# EAGLE board final_board (EAGLE 9.6.2)
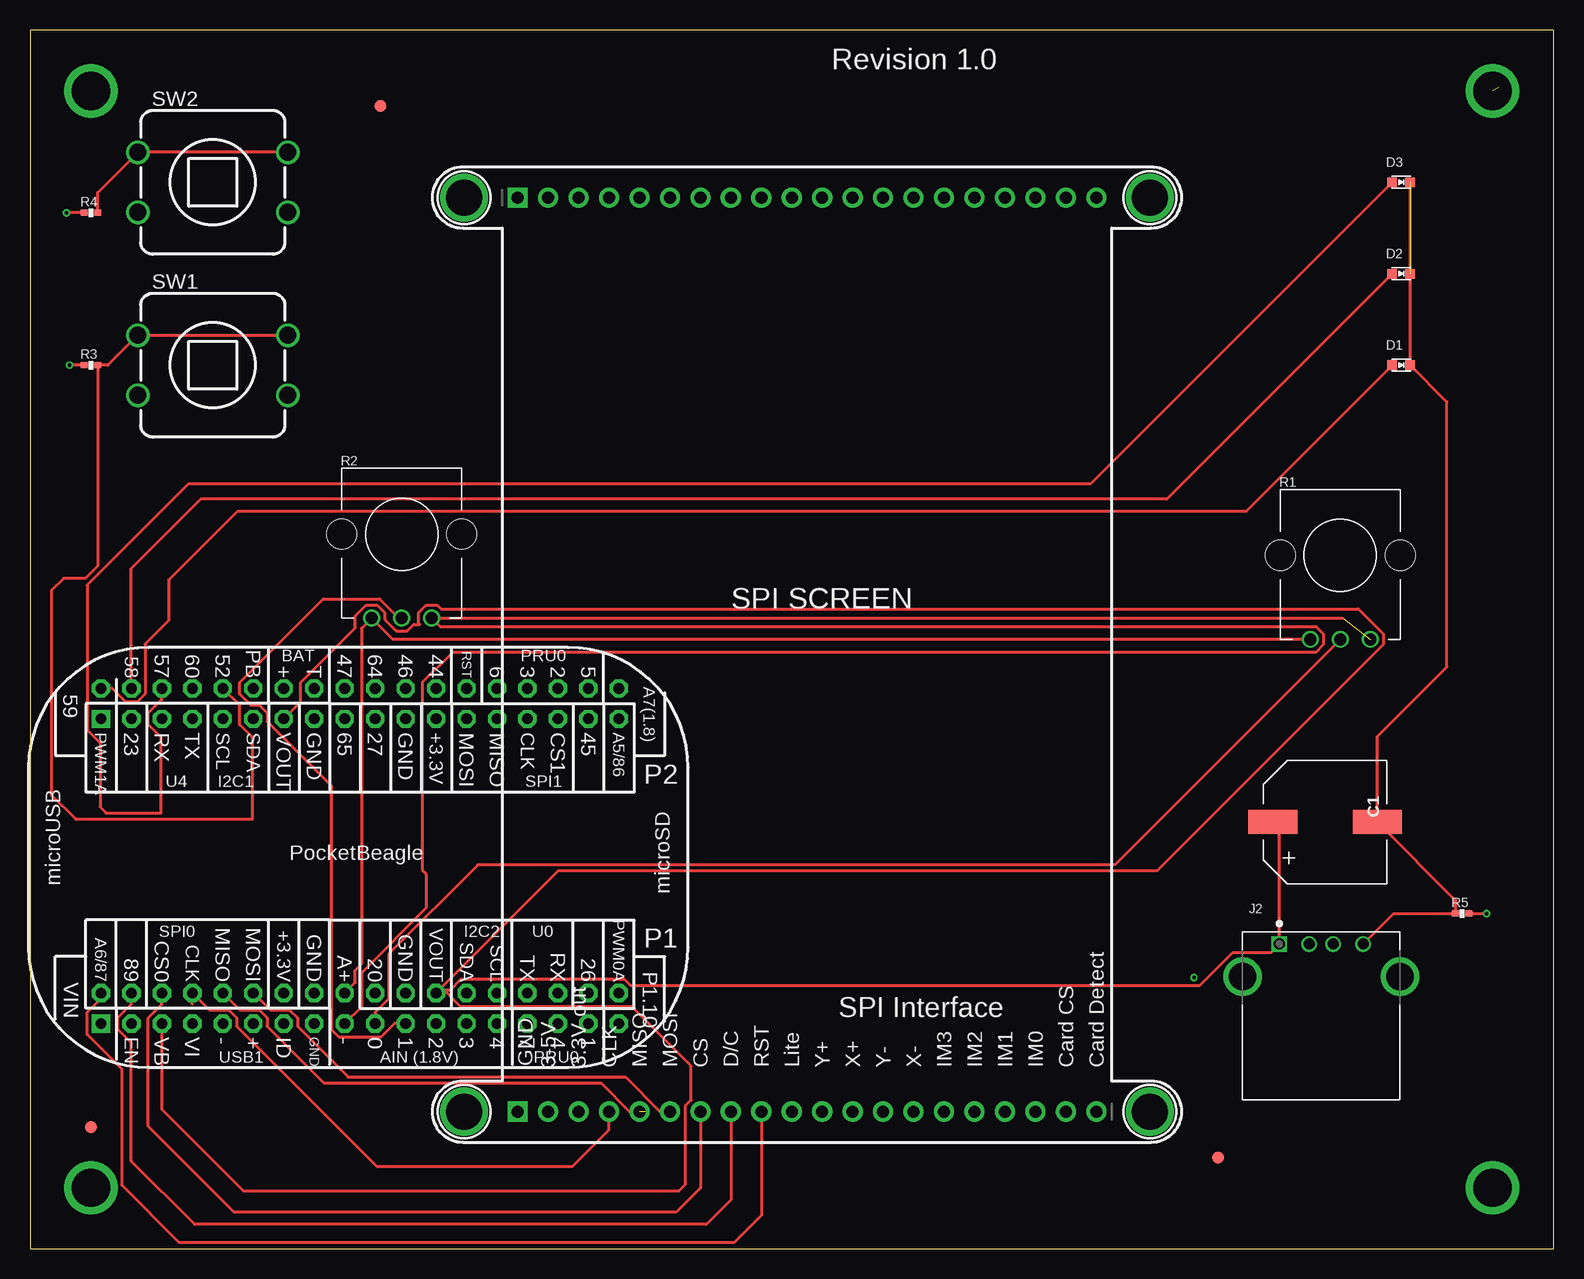
[diagram p0: board, top side]
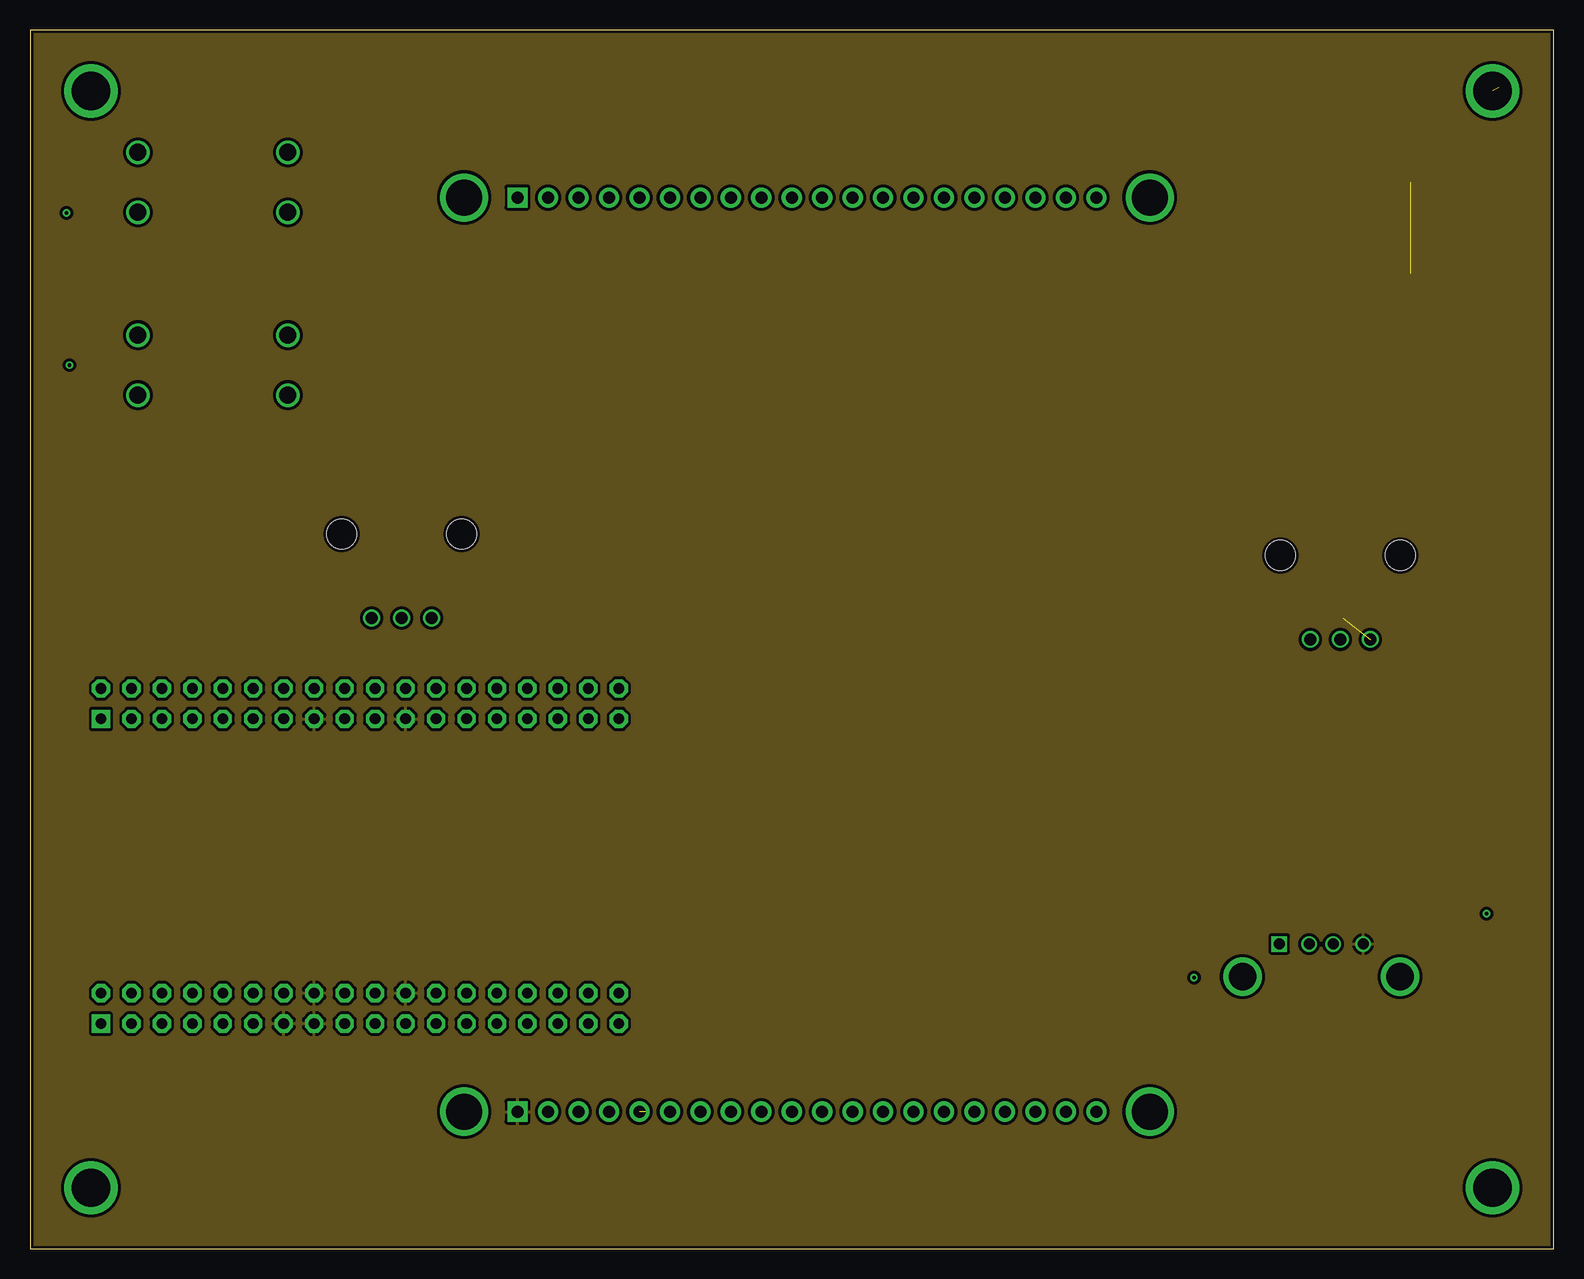
[diagram p1: board, inner layer Route2]
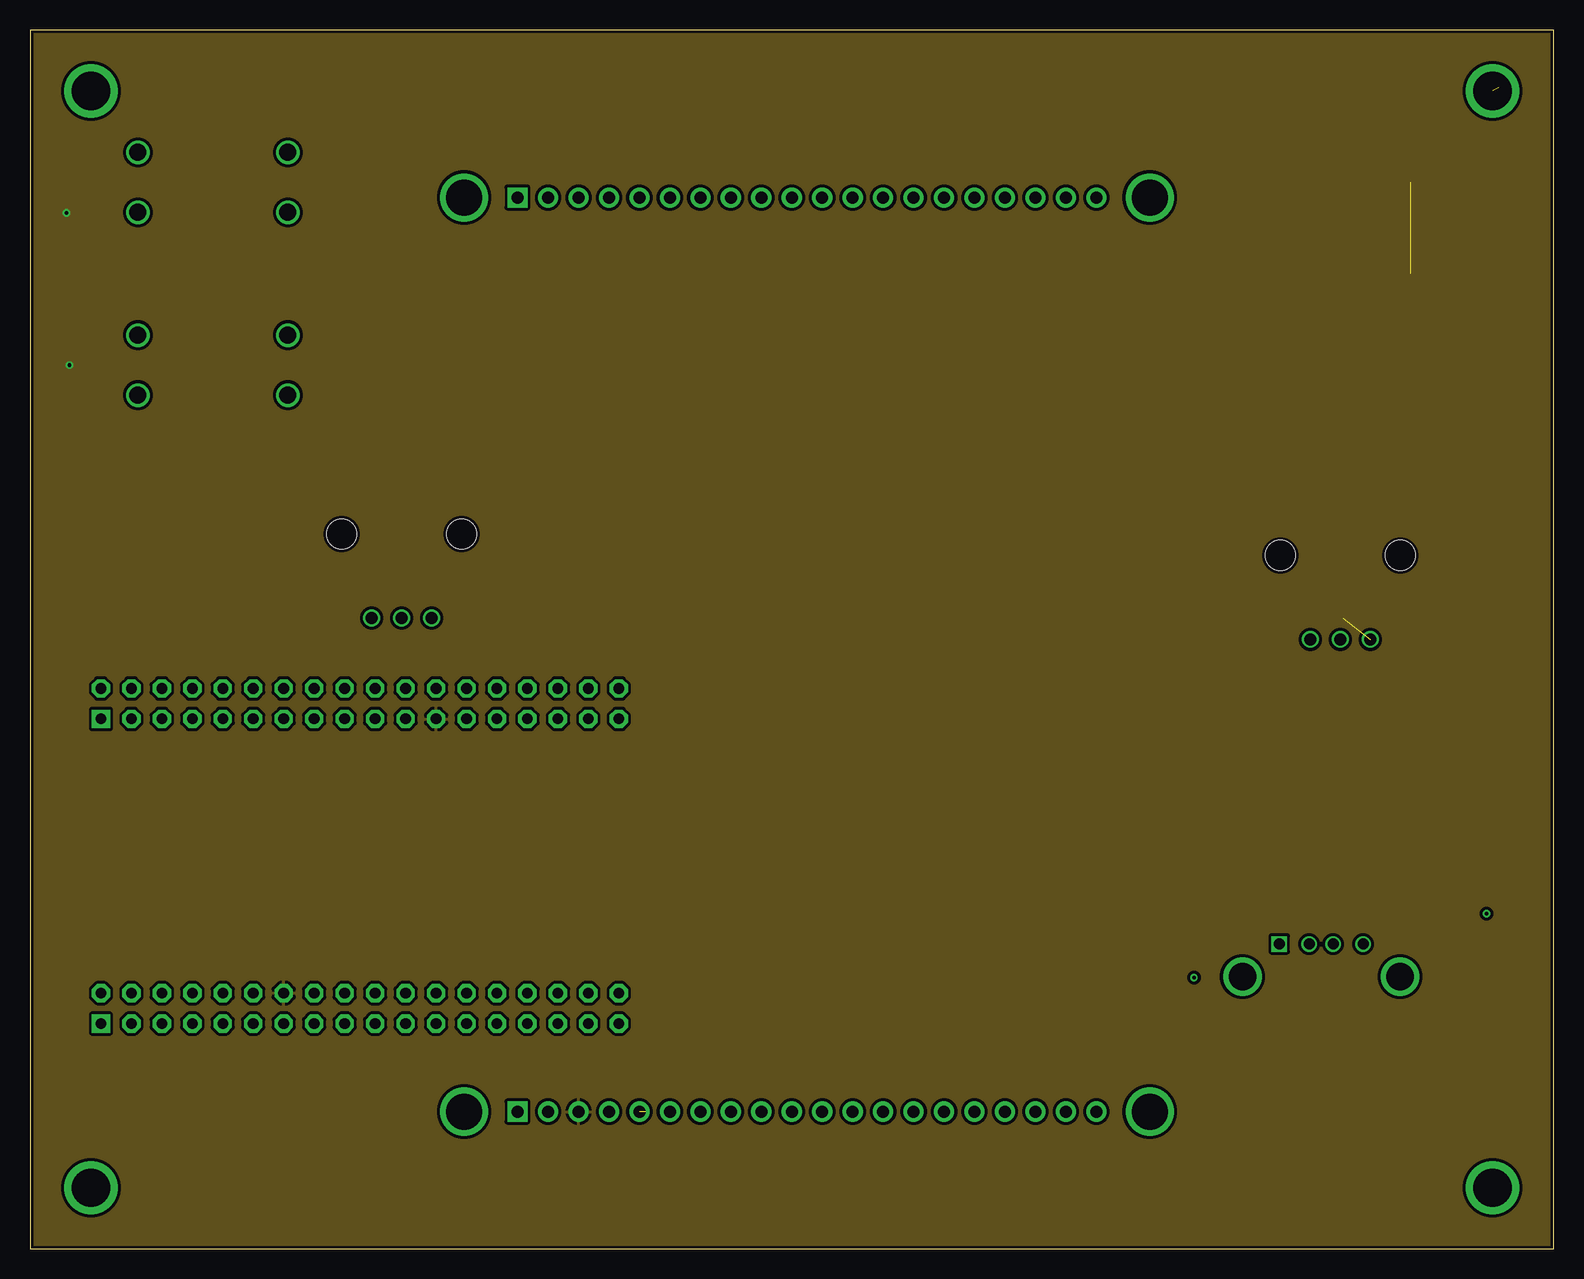
[diagram p2: board, inner layer Route15]
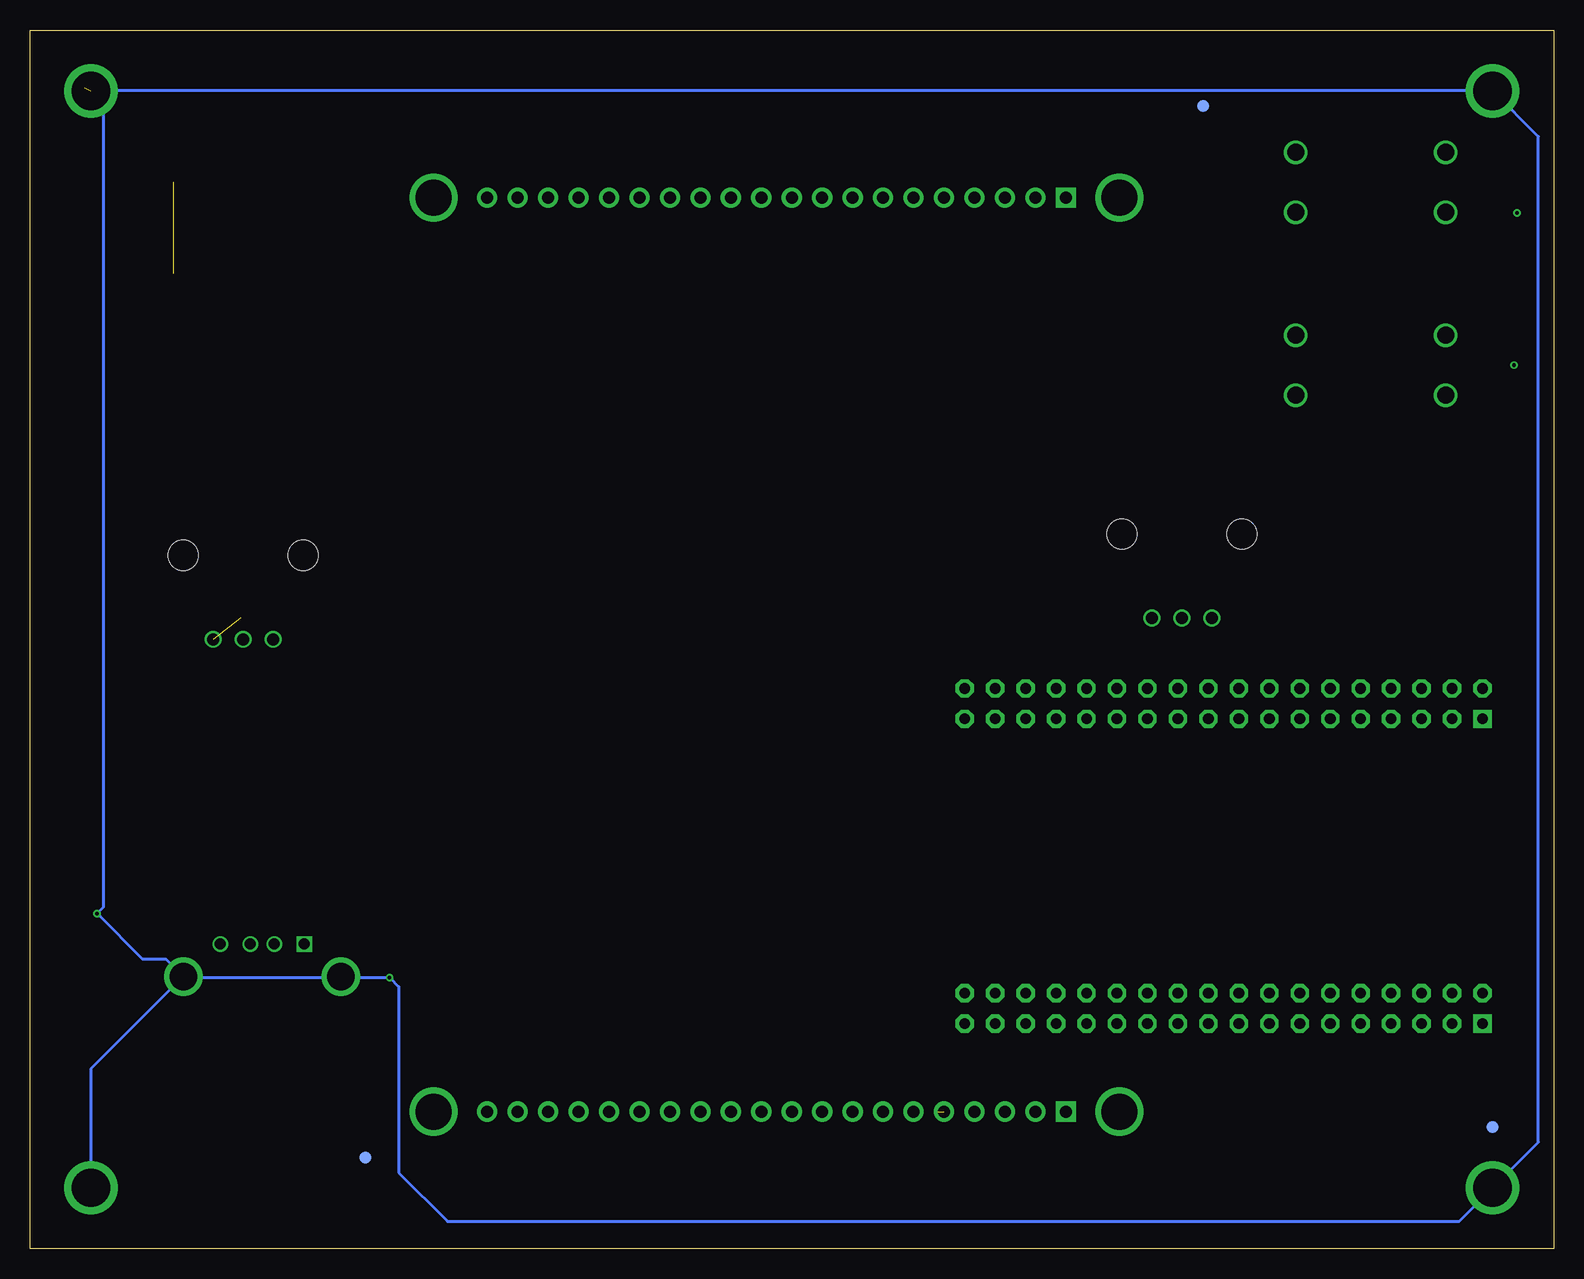
[diagram p3: board, bottom side, seen from below]

Size 127 x 101.6 mm. Coordinates in mm from the lower left corner, seen from the top.
Outline: 0,0 127,0 127,101.6 0,101.6 0,0
Copper layers (1*2*15*16): Top 0.035mm / dielectric 0.23mm / Route2 0.035mm / dielectric 0.93mm / Route15 0.035mm / dielectric 0.23mm / Bottom 0.035mm
Design rules "ENGI301_4lyr (1)": minimum track width 10mil, minimum drill 12mil, track to track 10mil, track to pad 10mil, pad to pad 10mil, via to via 10mil, smd to smd 10mil, copper to edge 10mil, drill to drill 12mil, minimum pad ring 6mil, minimum via ring 6mil, stop-mask expansion 3mil, vias tented up to drill 25mil, thermal gap 10mil

## Footprints (pad centres in the part's own frame; a part is rotated, then mirrored left to right if it is on the bottom)
CP10MM = smd 2 x 4.1: P$1 0,-4.35; P$2 0,4.35
EIA-STD = smd 0.8 x 0.8: ANODE -0.75,0; CATHODE 0.75,0
FIDUCIAL_40MIL = smd 1.016 x 1.016: P$1 0,0
TFT_LCD_PCB = drill 1 pad 1.676 square: 1@JP1 -24.13,38.1; 1@JP2 -24.13,-38.1 | drill 1 pad 1.676: 2@JP1 -21.59,38.1; 2@JP2 -21.59,-38.1; 3@JP1 -19.05,38.1; 3@JP2 -19.05,-38.1; 4@JP1 -16.51,38.1; 4@JP2 -16.51,-38.1; 5@JP1 -13.97,38.1; 5@JP2 -13.97,-38.1; 6@JP1 -11.43,38.1; 6@JP2 -11.43,-38.1; 7@JP1 -8.89,38.1; 7@JP2 -8.89,-38.1; 8@JP1 -6.35,38.1; 8@JP2 -6.35,-38.1; 9@JP1 -3.81,38.1; 9@JP2 -3.81,-38.1; 10@JP1 -1.27,38.1; 10@JP2 -1.27,-38.1; 11@JP1 1.27,38.1; 11@JP2 1.27,-38.1; 12@JP1 3.81,38.1; 12@JP2 3.81,-38.1; 13@JP1 6.35,38.1; 13@JP2 6.35,-38.1; 14@JP1 8.89,38.1; 14@JP2 8.89,-38.1; 15@JP1 11.43,38.1; 15@JP2 11.43,-38.1; 16@JP1 13.97,38.1; 16@JP2 13.97,-38.1; 17@JP1 16.51,38.1; 17@JP2 16.51,-38.1; 18@JP1 19.05,38.1; 18@JP2 19.05,-38.1; 19@JP1 21.59,38.1; 19@JP2 21.59,-38.1; 20@JP1 24.13,38.1; 20@JP2 24.13,-38.1 | drill 3 pad 3.6: P$1@U$7 -28.575,-38.1; P$1@U$15 28.575,-38.1; P$1@U$16 -28.575,38.1; P$1@U$17 28.575,38.1
TE_292303-1 = drill 0.92 square: 1 0,0 | drill 0.92: 2 2.5,0; 3 4.5,0; 4 7,0 | drill 2.3: SH1 -3.07,-2.71; SH2 10.07,-2.71
MOUNTING_HOLE = drill 3.175 pad 4.445: P$1 0,0
POT-PO90S = drill 1: CCW -2.5,0; CW 2.5,0; S 0,0 | hole 2.5: -5,7; 5,7
R0402 = smd 0.61 x 0.508: 1 -0.559,0; 2 0.559,0
BUTTON_12.5MM = drill 1.4: 1 -6.25,2.5; 2 -6.25,-2.5; 3 6.25,2.5; 4 6.25,-2.5
POCKETBEAGLE = drill 0.889 pad 1.524 square: P1_01 5.91,3.53; P2_01 5.91,28.93 | drill 0.889 pad 1.524 octagon: P1_02 5.91,6.07; P1_03 8.45,3.53; P1_04 8.45,6.07; P1_05 10.99,3.53; P1_06 10.99,6.07; P1_07 13.53,3.53; P1_08 13.53,6.07; P1_09 16.07,3.53; P1_10 16.07,6.07; P1_11 18.61,3.53; P1_12 18.61,6.07; P1_13 21.15,3.53; P1_14 21.15,6.07; P1_15 23.69,3.53; P1_16 23.69,6.07; P1_17 26.23,3.53; P1_18 26.23,6.07; P1_19 28.77,3.53; P1_20 28.77,6.07; P1_21 31.31,3.53; P1_22 31.31,6.07; P1_23 33.85,3.53; P1_24 33.85,6.07; P1_25 36.39,3.53; P1_26 36.39,6.07; P1_27 38.93,3.53; P1_28 38.93,6.07; P1_29 41.47,3.53; P1_30 41.47,6.07; P1_31 44.01,3.53; P1_32 44.01,6.07; P1_33 46.55,3.53; P1_34 46.55,6.07; P1_35 49.09,3.53; P1_36 49.09,6.07; P2_02 5.91,31.47; P2_03 8.45,28.93; P2_04 8.45,31.47; P2_05 10.99,28.93; P2_06 10.99,31.47; P2_07 13.53,28.93; P2_08 13.53,31.47; P2_09 16.07,28.93; P2_10 16.07,31.47; P2_11 18.61,28.93; P2_12 18.61,31.47; P2_13 21.15,28.93; P2_14 21.15,31.47; P2_15 23.69,28.93; P2_16 23.69,31.47; P2_17 26.23,28.93; P2_18 26.23,31.47; P2_19 28.77,28.93; P2_20 28.77,31.47; P2_21 31.31,28.93; P2_22 31.31,31.47; P2_23 33.85,28.93; P2_24 33.85,31.47; P2_25 36.39,28.93; P2_26 36.39,31.47; P2_27 38.93,28.93; P2_28 38.93,31.47; P2_29 41.47,28.93; P2_30 41.47,31.47; P2_31 44.01,28.93; P2_32 44.01,31.47; P2_33 46.55,28.93; P2_34 46.55,31.47; P2_35 49.09,28.93; P2_36 49.09,31.47

## Placement (x,y rotation side)
C1  [CP10MM]  107.95,35.56 270 top
D1  LED  [EIA-STD]  114.3,73.66 0 top
D2  LED  [EIA-STD]  114.3,81.28 0 top
D3  LED  [EIA-STD]  114.3,88.9 0 top
FUD1  FIDUCIAL  [FIDUCIAL_40MIL]  99.06,7.62 0 bottom
FUD2  FIDUCIAL  [FIDUCIAL_40MIL]  29.21,95.25 0 top
FUD4  FIDUCIAL  [FIDUCIAL_40MIL]  5.08,10.16 0 top
FUD5  FIDUCIAL  [FIDUCIAL_40MIL]  99.06,7.62 0 top
FUD6  FIDUCIAL  [FIDUCIAL_40MIL]  29.21,95.25 0 bottom
FUD7  FIDUCIAL  [FIDUCIAL_40MIL]  5.08,10.16 0 bottom
J1  LCD  [TFT_LCD_PCB]  64.77,49.53 0 top
J2  292303-1  [TE_292303-1]  104.14,25.4 0 top
MGT1  MOUNTING_HOLE  [MOUNTING_HOLE]  5.08,96.52 0 top
MGT2  MOUNTING_HOLE  [MOUNTING_HOLE]  121.92,96.52 0 top
MGT3  MOUNTING_HOLE  [MOUNTING_HOLE]  121.92,5.08 0 top
MGT4  MOUNTING_HOLE  [MOUNTING_HOLE]  5.08,5.08 0 top
R1  POTENTIOMETER  [POT-PO90S]  109.22,50.8 0 top
R2  POTENTIOMETER  [POT-PO90S]  30.99,52.58 0 top
R3  [R0402]  5.08,73.66 0 top
R4  [R0402]  5.08,86.36 0 top
R5  [R0402]  119.38,27.94 0 top
SW1  PUSH_BUTTON  [BUTTON_12.5MM]  15.24,73.66 0 top
SW2  PUSH_BUTTON  [BUTTON_12.5MM]  15.24,88.9 0 top
U1  POCKETBEAGLE  [POCKETBEAGLE]  0,15.24 0 top

## Library data of the parts
C1 = combo_lock; POPULATE: 1
D1-D3 FUD1 FUD2 FUD4-FUD7 MGT1-MGT4 R1-R5 SW1 SW2 U1 = combo_lock
J1 = lcd
J2 = combo_lock; AVAILABILITY: In Stock; CENTERLINE_PITCH: 2 mm[.078 in]; COMMENT: 292303-1; DESCRIPTION: Conn; Data; USB; Recept; 2.0; 4 Pos; 1 Port; Rt Angle; A Ser; Tin over Copper; EU_ROHS_COMPLIANCE: Compliant; MF: TE Connectivity; MP: 292303-1; NUMBER_OF_POSITIONS: 4; PACKAGE: None; PRICE: None; PRODUCT_TYPE: Connector; PURCHASE-URL: https://pricing.snapeda.com/search/part/292303-1/?ref=eda

## Nets
AGND: R1.CW R2.CW U1.P1_17
BAT.VIN: U1.P2_14
BUTTON-2: U1.P2_08
BUTTON_1: R3.2 SW1.1 SW1.3 U1.P2_10
BUTTON_2: R4.2 SW2.1 SW2.3
CGND: J2.SH1 J2.SH2 MGT1.P$1 MGT2.P$1 MGT3.P$1 MGT4.P$1 R5.2
GND: C1.P$2 D1.CATHODE D2.CATHODE D3.CATHODE J1.1@JP2 J2.4 R5.1 U1.P1_13 U1.P1_15 U1.P1_16 U1.P1_22 U1.P2_15 U1.P2_21
LCD_CLK: J1.4@JP2 U1.P1_08
LCD_CS: J1.7@JP2 U1.P1_06
LCD_DC: J1.8@JP2 U1.P1_04
LCD_MISO: J1.5@JP2 U1.P1_10
LCD_MOSI: J1.6@JP2 U1.P1_12
LCD_RST: J1.9@JP2 U1.P1_02
LED_BLUE: D3.ANODE U1.P2_06
LED_GREEN: D2.ANODE U1.P2_04
LED_RED: D1.ANODE U1.P2_02
LEFT_POT: R1.S U1.P1_19
N$1: J2.2
N$2: U1.P1_09
N$3: U1.P1_11
N$4: J2.3
RIGHT_POT: R2.S U1.P1_21
VDD_1P8V: R1.CCW R2.CCW U1.P1_18
VDD_3P3V: J1.3@JP2 R3.1 R4.1 U1.P1_14 U1.P2_23
VDD_5V: C1.P$1 J2.1 U1.P1_05 U1.P1_24 U1.P2_13
VIN: U1.P1_01

## Tracks (layer width: path | path; a pad name or v marks a point on that pad's centre or on a via)
AGND  (1 unrouted)
  Top 0.254: U1.P1_17 27.63,20.17 27.63,23.01 33.02,28.4 33.02,31.24 32.71,31.55 32.71,47.18 35.24,49.72 107.17,49.72 107.8,50.35 107.8,51.25 107.17,51.88 34.19,51.88 R2.CW 109.43,52.58
BUTTON_1
  Top 0.254: SW1.3 SW1.1 6.49,73.66 R3.2 5.64,56.9 4.62,55.88 2.79,55.88 1.78,54.86 1.78,37.85 3.81,35.81 18.54,35.81 18.54,42.62 17.47,43.7 17.47,45.31 U1.P2_10 16.07,46.55
BUTTON_2
  Top 0.254: R4.2 5.64,88.05 8.96,91.37 SW2.1 SW2.3
CGND  (via drill 0.3 pad 0.61)  (1 unrouted)
  Top 0.254: R5.2 v121.41,27.94
  Bottom 0.254: J2.SH1 100.99,22.61 | 100.99,22.61 v97.03,22.61 96.27,21.84 96.27,6.35 92.2,2.29 7.87,2.29 MGT4.P$1 1.27,8.89 1.27,92.71 MGT1.P$1 122.17,96.52 122.43,96.77 | MGT3.P$1 121.92,14.98 J2.SH2 115.65,24.13 117.6,24.13 v121.41,27.94 120.9,28.45 120.9,95.5 MGT2.P$1 | 114.81,22.61 100.99,22.61
GND  (1 unrouted)
  Top 0.254: D3.CATHODE 115.06,88.89 115.06,80.52 115.05,80.51 D1.CATHODE 118.11,70.6 118.11,48.51 112.3,42.7 C1.P$2 118.82,29.04 R5.1 113.68,27.94 J2.4
  pour Route2: -5.08,-5.08 -5.08,106.68 132.08,106.68 132.08,-5.08
LCD_CLK
  Top 0.254: 13.53,20.39 U1.P1_08 14.93,19.91 16.54,19.91 17.21,19.24 17.21,18.55 28.91,6.86 45.21,6.86 48.26,9.91 J1.4@JP2
LCD_CS
  Top 0.254: U1.P1_06 10.99,20.39 9.85,19.24 9.85,10.22 17.02,3.05 53.85,3.05 55.88,5.08 J1.7@JP2
LCD_DC
  Top 0.254: J1.8@JP2 58.42,4.06 56.39,2.03 13.72,2.03 8.45,7.3 8.45,17.15 7.31,18.3 7.31,19.24 8.45,20.39 U1.P1_04
LCD_MISO  (1 unrouted)
  Top 0.254: U1.P1_10 17.47,19.91 19.08,19.91 19.75,19.24 19.75,18.55 24.48,13.82 47.59,13.82 49.98,11.43 51.31,11.43
LCD_MOSI
  Top 0.254: U1.P1_12 20.01,19.91 21.62,19.91 22.29,19.24 22.29,18.55 26.52,14.33 49.63,14.33 52.52,11.43 J1.6@JP2
LCD_RST
  Top 0.254: J1.9@JP2 60.96,2.79 58.67,0.51 12.45,0.51 7.68,5.27 7.68,14.93 4.77,17.85 4.77,19.69 5.91,20.83 U1.P1_02
LED_BLUE
  Top 0.254: D3.ANODE 88.4,63.75 13.21,63.75 4.77,55.31 4.77,43.25 5.84,42.17 5.84,36.83 6.35,36.32 10.92,36.32 10.92,42.62 9.85,43.7 9.85,44.64 10.99,45.79 U1.P2_06 11.18,46.9
LED_GREEN
  Top 0.254: D2.ANODE 94.75,62.48 14.22,62.48 8.38,56.64 8.38,46.78 U1.P2_04
LED_RED
  Top 0.254: D1.ANODE 101.36,61.47 17.27,61.47 11.56,55.75 11.56,52.36 9.59,50.39 9.59,46.24 8.92,45.57 7.98,45.57 6.83,46.71 U1.P2_02
LEFT_POT
  Top 0.254: R1.S 90.42,32 37.34,32 29.91,24.58 29.91,20.84 28.77,19.69 U1.P1_19
RIGHT_POT
  Top 0.254: U1.P1_21 30.39,18.77 29.24,17.63 25.76,17.63 25.09,18.3 25.09,38.62 19.75,43.95 19.75,44.64 19.08,45.31 18.39,45.31 17.47,46.24 17.47,47.18 24.45,54.17 29.15,54.17 30.73,52.58 R2.S
VDD_1P8V
  Top 0.254: R1.CCW 30.27,50.8 R2.CCW 27.63,51.72 27.63,23.73 27.12,23.22 27.12,22.2 U1.P1_18
VDD_3P3V  (via drill 0.3 pad 0.61)
  Top 0.254: R3.1 v3.3,73.66 | R4.1 v3.05,86.36
  pour Route15: -7.62,-7.62 -7.62,109.22 134.62,109.22 134.62,-7.62
VDD_5V
  Top 0.254: C1.P$1 104.14,35.02 J2.1 103.42,24.68 100.25,24.68 97.48,21.92 50.1,21.92 49.56,22.45 35.92,22.45 35.01,21.54 34.08,21.54 | 34.08,21.54 44.04,31.5 93.94,31.5 112.8,50.35 112.8,51.25 110.71,53.34 34.26,53.34 33.94,53.66 33.04,53.66 32.41,53.03 32.41,52.13 32.49,52.05 31.99,52.05 31.44,51.5 30.54,51.5 29.57,52.47 29.57,53.03 28.94,53.66 28.04,53.66 27.12,52.74 27.12,51.76 22.55,47.18 22.55,45.57 U1.P2_13 | 34.08,21.54 U1.P1_24 34.77,21.31 35.92,20.17 50.19,20.17 55.12,15.24 55.12,12.39 54.66,11.94 54.66,5.38 54.1,4.83 17.78,4.83 10.99,11.62 U1.P1_05

## Text on the board
tPlace: Revision 1.0